# Altium PCB 主板-20190829.PcbDoc (part 2 of 6)
Units mm, origin at the board's own origin, x right, y up, seen from the top; angles counter-clockwise.
Board outline 97.69 x 103.45 mm, 2 copper layers (Top Layer, Bottom Layer); 77 components, 70 nets, 247 pads, 251 vias.
Unrouted connection lines stored in the file: 4.
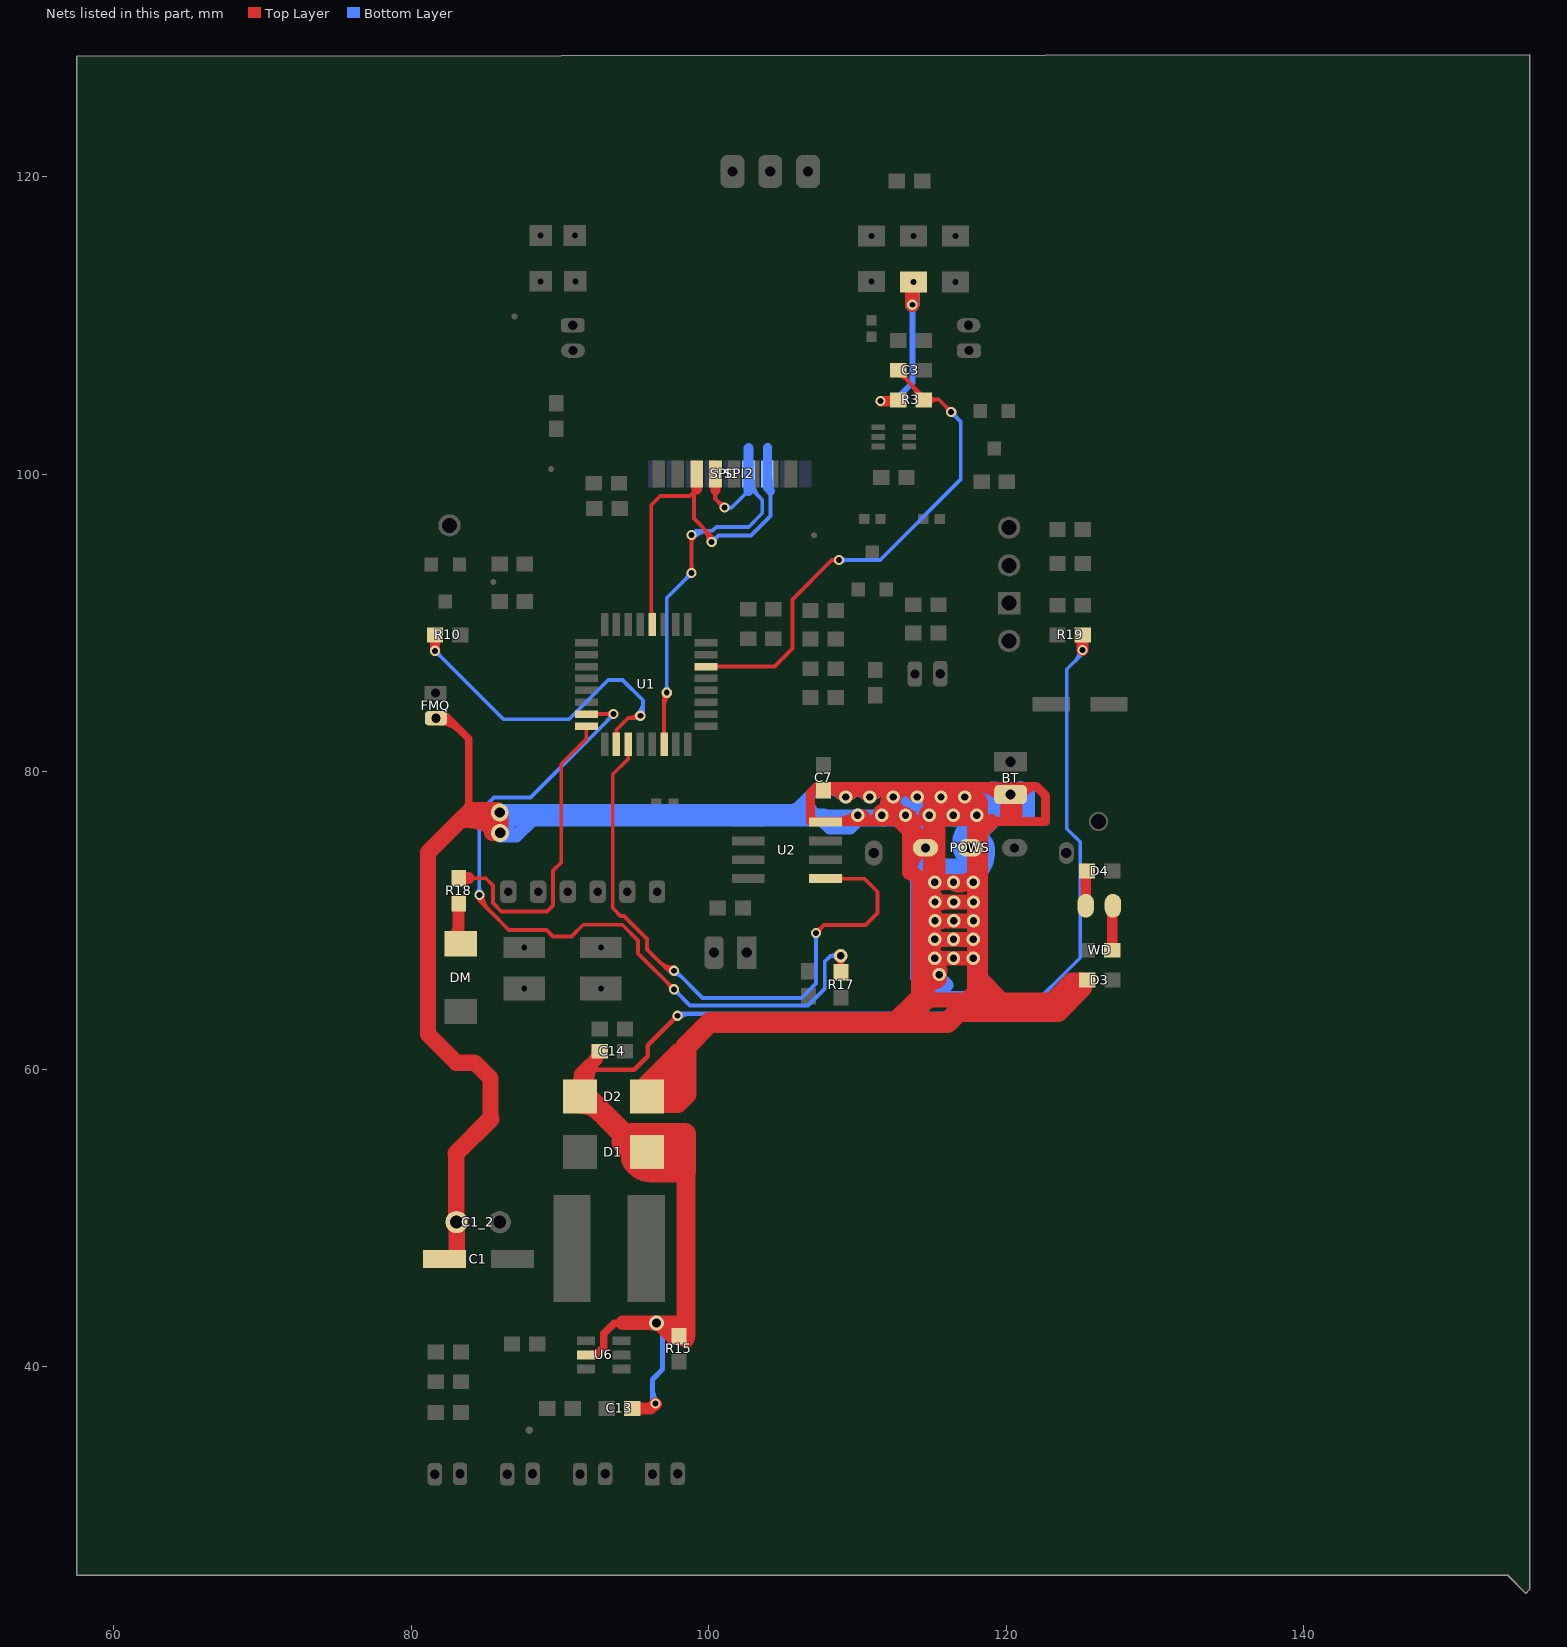
[diagram p2: the nets of this part, all layers, seen from the top]

## Via types
v1: diameter 0.9, hole 0.5, Top Layer to Bottom Layer, 107 vias
v2: diameter 0.68, hole 0.4, Top Layer to Bottom Layer, 87 vias
v3: diameter 1.1, hole 0.6, Top Layer to Bottom Layer, tented both sides, 17 vias
v4: diameter 0.6, hole 0.4, Top Layer to Bottom Layer, 7 vias
v5: diameter 0.8, hole 0.5, Top Layer to Bottom Layer, 5 vias
v6: diameter 0.7, hole 0.4, Top Layer to Bottom Layer, 5 vias
v7: diameter 1, hole 0.6, Top Layer to Bottom Layer, 4 vias
v8: diameter 1, hole 0.8, Top Layer to Bottom Layer, tented both sides, 4 vias
v9: diameter 1, hole 0.65, Top Layer to Bottom Layer, tented both sides, 4 vias
v10: diameter 1.2, hole 0.7, Top Layer to Bottom Layer, tented both sides, 2 vias
v11: diameter 1.1, hole 0.68, Top Layer to Bottom Layer, 2 vias
v12: diameter 0.8, hole 0.4, Top Layer to Bottom Layer, 2 vias
v13: diameter 0.9, hole 0.6, Top Layer to Bottom Layer, tented bottom, 1 vias
v14: diameter 0.95, hole 0.5, Top Layer to Bottom Layer, 1 vias
v15: diameter 0.9, hole 0.6, Top Layer to Bottom Layer, tented both sides, 1 vias
v16: diameter 1, hole 0.5, Top Layer to Bottom Layer, 1 vias
v17: diameter 1.1, hole 0.5, Top Layer to Bottom Layer, tented both sides, 1 vias

## Nets (pads, with @x,y where several pads share a name; then routed paths per layer and width w, separated by ;. In a path a pad name is that pad's centre, name@x,y a point inside that pad or via, vN(x,y) a via of type N, cw(c..) or ccw(c..) an arc to the next point about the centre after c; other vN are vias at no path point) (continued)
BT: BT.1 C1.2 C1_2.2 C7.2 D2.2 D3.1 FMQ.2 POWS.2 POWS.3 U2.4 | length 622.1
  Top Layer w0.5: FMQ.2@81.9,83.56 82.531,83.56 ; FMQ.2@81.931,83.375 cw(c81.931,81.482) 83.27,82.821 ; FMQ.2@81.931,83.875 cw(c81.931,83.19) 82.416,83.674 ; FMQ.2@82.106,83.755 ccw(c82.531,84.12) 82.531,83.56 ; 84.328,77.419 83.871,77.876 83.871,82.22 82.531,83.56
  Top Layer w0.6: 106.858,77.101 ccw(c107.528,77.101) U2.4@107.054,76.627 ; C7.2@107.864,78.662 cw(c108.727,77.8) 108.727,79.019 ; U2.4@108.628,76.657 ccw(c108.628,78.494) v1@109.927,77.195 ; 108.635,79.019 cw(c108.635,77.782) 109.556,78.609 ; 108.742,79.019 cw(c108.742,76.229) v1@110.715,78.202 ; v1@108.903,78.626 cw(c109.852,77.678) 109.852,79.019 ; v1@109.109,78.208 ccw(c107.29,76.573) C7.2@107.29,79.019 ; v1@109.327,78.202 cw(c111.3,76.229) 111.3,79.019 ; 110.133,76.632 ccw(c110.011,77.087) 110.481,77.13 ; v1@110.139,77.195 ccw(c111.437,78.494) 111.437,76.657 ; 110.19,79.019 cw(c110.19,77.678) v1@111.139,78.626 ; 110.228,76.657 ccw(c110.228,78.494) v1@111.527,77.195 ; 110.342,79.019 cw(c110.342,76.229) v1@112.315,78.202 ; v1@110.503,78.626 cw(c111.452,77.678) 111.452,79.019 ; v1@110.927,78.202 cw(c112.9,76.229) 112.9,79.019 ; 111.733,76.632 ccw(c111.611,77.087) 112.081,77.13 ; v1@111.74,77.193 ccw(c113.005,78.416) 113.005,76.657 ; 111.79,79.019 cw(c111.79,77.678) v1@112.739,78.626 ; 111.828,76.657 ccw(c111.828,78.494) v1@113.127,77.195 ; 111.942,79.019 cw(c111.942,76.229) v1@113.915,78.202 ; v1@112.103,78.626 cw(c113.052,77.678) 113.052,79.019 ; v1@112.527,78.202 cw(c114.5,76.229) 114.5,79.019 ; 113.333,76.632 ccw(c113.211,77.087) 113.681,77.13 ; v1@113.339,77.195 ccw(c114.637,78.494) 114.637,76.657 ; 113.39,79.019 cw(c113.39,77.678) v1@114.339,78.626 ; 113.428,76.657 ccw(c113.428,78.494) v1@114.727,77.195 ; 113.542,79.019 cw(c113.542,76.229) v1@115.515,78.202 ; v1@113.703,78.626 cw(c114.652,77.678) 114.652,79.019 ; v1@114.127,78.202 cw(c116.1,76.229) 116.1,79.019 ; 114.911,76.589 ccw(c114.781,77.076) 115.269,77.199 ; v1@114.939,77.195 ccw(c116.237,78.494) 116.237,76.657 ; 114.99,79.019 cw(c114.99,77.678) v1@115.939,78.626 ; 115.142,79.019 cw(c115.142,76.229) v1@117.115,78.202 ; v1@115.303,78.626 cw(c116.252,77.678) 116.252,79.019 ; v1@115.727,78.202 cw(c117.7,76.229) 117.7,79.019 ; v1@116.319,77.187 cw(c115.164,78.182) 115.164,76.657 ; 116.533,76.632 ccw(c116.411,77.087) 116.881,77.13 ; v1@116.539,77.195 ccw(c117.837,78.494) 117.837,76.657 ; 116.59,79.019 cw(c116.59,77.678) v1@117.539,78.626 ; 116.628,76.657 ccw(c116.628,78.494) v1@117.927,77.195 ; v1@116.903,78.626 cw(c117.852,77.678) 117.852,79.019 ; v1@117.327,78.202 cw(c119.3,76.229) BT.1@119.3,79.019 ; 117.683,79.019 cw(c117.683,76.305) BT.1@119.602,78.225 ; v1@118.164,77.162 ccw(c119.024,77.643) 119.024,76.657 ; 119.132,79.019 cw(c119.132,77.754) BT.1@120.027,78.649 ; BT.1@119.384,78.958 cw(c119.471,78.927) BT.1@119.471,79.019 ; BT.1@119.949,78.757 cw(c120.321,78.624) BT.1@120.321,79.019 ; BT.1@120.514,78.556 cw(c121.171,78.322) BT.1@121.171,79.019 ; BT.1@121.08,78.355 cw(c122.022,78.02) 122.022,79.019 ; C7.2@107.29,79.019 106.858,78.588 106.858,76.657 113.005,76.657 ; C7.2@107.29,79.019 122.022,79.019 ; 113.005,76.657 115.164,76.657 ; 115.164,76.657 119.024,76.657 ; 119.024,76.657 122.657,76.657 122.657,78.384 122.022,79.019
  Top Layer w1: C1_2.2@83.05,49.727 83.05,50.656 ; 113.487,73.231 cw(c115.328,73.231) POWS.3@114.376,74.806 ; 113.887,73.057 ccw(c115.189,74.359) v1@115.189,72.518 ; 114.097,64.668 117.577,64.668 119.024,64.668 ; POWS.3@114.354,74.987 cw(c114.734,76.175) 113.487,76.175 113.487,73.457 114.351,72.593 ccw(c114.823,73.065) v1@115.219,72.528 ; v1@114.859,72.517 115.672,72.517 ; v1@114.884,69.926 115.697,69.926 ; v1@114.884,71.196 115.697,71.196 ; v1@115.164,72.644 v1@117.373,72.644 ; 115.672,67.462 v1(116.459,67.462) v1(117.78,67.462) v1@117.881,67.462 ; 115.672,68.732 v1(116.459,68.732) v1(117.78,68.732) v1@117.881,68.732 ; 115.672,72.568 v1(116.459,72.568) v1(117.78,72.568) v1@117.881,72.568 ; 115.697,69.977 v1(116.484,69.977) v1(117.805,69.977) v1@117.907,69.977 ; 115.697,71.247 v1(116.484,71.247) v1(117.805,71.247) v1@117.907,71.247 ; v1@116.429,72.528 ccw(c116.864,73.103) 117.373,72.593 v1@117.615,72.834 ; v1@116.446,72.519 ccw(c116.757,73.692) v1@117.615,72.834 ; 117.227,72.611 cw(c117.516,72.111) v1@117.805,72.611 ; 117.301,72.551 cw(c117.625,71.99) v1@117.793,72.616 ; v1@117.73,72.568 cw(c118.652,72.568) 118,73.22 ; POWS.2@117.753,74.821 cw(c116.524,73.592) 118.262,73.592 ; POWS.2@117.769,74.975 ccw(c117.158,75.895) 118.262,75.895 ; v1@117.794,72.52 ccw(c117.602,73.152) 118.262,73.152 ; v1@117.811,68.772 cw(c117.346,68.183) 118.022,67.86 ; v1@117.812,72.53 ccw(c117.013,73.457) 118.237,73.457 ; v1@117.815,67.427 ccw(c116.797,68.445) 118.237,68.445 ; v1@117.815,67.498 cw(c116.797,66.479) 118.237,66.479 118.237,73.127 ; v1@117.815,68.697 ccw(c116.797,69.715) 118.237,69.715 ; v1@117.815,68.768 cw(c116.797,67.749) 118.237,67.749 ; v1@117.815,72.532 ccw(c116.735,73.612) 118.262,73.612 ; v1@117.815,72.603 cw(c116.797,71.585) 118.237,71.585 ; v1@117.841,69.942 ccw(c116.883,70.899) 118.237,70.899 ; v1@117.841,70.012 cw(c116.883,69.055) 118.237,69.055 ; v1@117.841,71.212 ccw(c116.883,72.169) 118.237,72.169 ; v1@117.841,71.282 cw(c116.883,70.325) 118.237,70.325 ; POWS.2@117.923,74.904 cw(c119.104,75.054) 118.262,75.895 ; POWS.2@117.924,74.892 cw(c119.529,74.892) 118.394,76.027 ; 119.024,76.657 118.262,75.895 ; D3.1@125.15,66 124.395,66 123.063,64.668 119.736,64.668 ; v1@117.615,72.834 117.945,72.834 118.237,73.127 ; v1@117.615,72.834 118.237,73.457 ; 118.237,73.127 cw(c117.6,73.127) 117.795,72.52 ccw(c117.6,73.127) 118.237,73.127 ; 118.237,73.127 118.262,73.152 ; 118.237,73.127 118.237,73.457 ; 118.262,73.152 118.262,75.895 ; 119.024,64.668 119.736,64.668 ; 119.024,64.668 118.237,65.456 118.237,66.167 119.736,64.668 ; v1@113.268,77.124 cw(c112.739,76.595) 113.487,76.595 ccw(c112.739,76.595) v1@113.268,77.124
  Top Layer w1.1: C1_2.2@83.033,49.727 83.033,54.356 ; 83.05,47.898 C1_2.2@83.05,49.727 ; 83.773,76.759 cw(c83.773,73.69) v10@85.944,75.86 ; 84.606,76.759 ccw(c84.606,78.614) v10@85.918,77.302 ; 85.327,56.65 85.327,59.403 84.277,60.452 83.033,60.452 81.128,62.357 81.128,74.574 83.312,76.759 ; v10@85.446,75.92 cw(c87.301,75.92) v10@85.989,77.231 ; 85.446,76.548 cw(c86.137,76.548) v10@85.966,77.218 ; v10(85.954,77.267) 85.801,77.419 84.328,77.419 83.972,77.419 83.312,76.759 ; v10@85.998,75.942 cw(c86.326,76.759) 85.446,76.759 ; v10@86.004,77.216 86.004,75.895 85.446,75.895 85.446,76.759 ; 83.312,76.759 85.446,76.759
  Top Layer w1.2: 83.033,54.356 85.327,56.65 ; v1@111.633,77.239 cw(c111.633,75.331) 112.982,76.68 ; 112.166,77.292 112.37,77.292 ; v1@112.271,78.308 ccw(c114.486,78.308) 112.92,76.742 ; v1@112.303,78.401 ccw(c112.961,77.884) 112.37,77.292 ; 112.492,77.482 ccw(c113.493,78.06) v1@113.194,76.944 ; v1@113.083,77.089 ccw(c114.313,77.089) 113.443,76.219 ; v1@113.234,76.939 cw(c113.222,78.145) 112.37,77.292 ; 114.009,75.653 cw(c113.247,74.892) POWS.3@114.324,74.892 ; 114.174,75.488 113.005,76.657 112.37,77.292 ; v1@114.727,77.195 cw(c116.003,75.918) 116.003,77.724 ; 115.262,77.724 cw(c115.262,75.918) v1@116.539,77.195 ; v1@115.515,78.202 ccw(c116.669,79.356) 116.669,77.724 ; v1@115.771,78.3 cw(c115.164,78.332) 115.164,77.724 117.932,77.724 cw(c117.932,78.674) v1@117.088,78.24 ; 116.173,77.724 ccw(c116.173,79.356) v1@117.327,78.202 ; v1@116.327,77.195 cw(c117.603,75.918) 117.603,77.724 ; 116.862,77.724 cw(c116.862,75.918) v1@118.139,77.195
  Top Layer w1.4: D2.2@95.91,57.836 D2.2@95.91,58.166 ; D2.2@96.105,58.537 ccw(c96.763,59.497) 97.587,58.674 ; D2.2@96.168,58.484 ccw(c97.917,60.232) 97.917,57.76 ; D2.2@96.3,58.166 cw(c99.203,58.166) 97.15,60.219 ; 97.587,60.655 97.587,58.674 ; 97.993,61.062 95.91,58.979 D2.2@95.91,58.166 ; 114.097,64.668 112.573,63.144 ; v1@117.322,78.537 cw(c116.802,77.364) v1@118.085,77.364 ; v1@117.398,78.485 cw(c115.74,76.827) v1@118.085,76.827 ; 118.085,77.927 118.085,65.176 117.577,64.668 116.802,63.894 ; 125.07,65.481 123.482,63.894 116.802,63.894 ; D2.2@95.91,58.166 96.317,57.76 97.917,57.76 ; D2.2@95.91,58.166 D2.2@95.85,58.166 97.079,58.166 97.587,58.674 ; 97.917,57.76 98.476,58.318 98.476,61.544 100.076,63.144 112.573,63.144 ; 112.573,63.144 116.053,63.144 116.802,63.894
  Top Layer w1.5: 114.351,64.526 cw(c117.09,64.526) v1@115.297,66.597 ; 114.351,64.922 114.351,72.593 ccw(c116.54,72.593) v1@115.004,71.033 ; 114.351,66.163 cw(c116.488,66.163) v1@114.977,67.675 ; 114.351,67.433 cw(c116.488,67.433) v1@114.977,68.945 ; 114.351,68.405 ccw(c117.529,68.405) v1@115.282,66.158 ; 114.351,68.616 cw(c116.575,68.616) v1@115.002,70.189 ; 114.351,68.762 ccw(c116.488,68.762) v1@114.977,67.25 ; 114.351,69.886 cw(c116.575,69.886) v1@115.002,71.459 ; 114.351,70.032 ccw(c116.488,70.032) v1@114.977,68.52 ; 114.351,71.268 cw(c116.488,71.268) v1@114.977,72.78 ; 114.351,71.338 ccw(c116.575,71.338) v1@115.002,69.765 ; v1@115.164,72.593 115.164,72.644 115.164,76.657 115.164,77.724 ; 120.345,77.216 120.345,77.572 ; 115.164,77.928 cw(c116.001,77.928) 115.409,78.52 ccw(c116.001,77.928) 115.164,77.928
  Bottom Layer w0.8: 105.693,77.27 105.896,77.473 107.34,78.918 117.132,78.918 ; 106.829,77.473 107.224,77.079 107.544,76.759 108.128,76.175 109.525,76.175 v1@110.058,76.708 ; 107.629,78.918 cw(c107.629,76.716) v1@109.186,78.273 ; 108.992,76.708 ccw(c108.992,78.13) v1@109.997,77.124 ; 109.229,78.918 cw(c109.229,76.716) v1@110.786,78.273 ; v1@109.256,78.273 cw(c110.813,76.716) 110.813,78.918 ; 109.66,76.31 ccw(c108.88,77.089) v1@109.983,77.089 ; v1@110.068,77.124 ccw(c111.073,78.13) 111.073,76.708 ; v1@110.338,76.987 v1@110.058,76.708 ; 110.592,76.708 ccw(c110.592,78.13) v1@111.597,77.124 ; 110.829,78.918 cw(c110.829,76.716) v1@112.386,78.273 ; v1@110.856,78.273 cw(c112.413,76.716) 112.413,78.918 ; v1@111.668,77.124 ccw(c112.673,78.13) 112.673,76.708 ; 112.192,76.708 ccw(c112.192,78.13) v1@113.197,77.124 ; 112.429,78.918 cw(c112.429,76.716) v1@113.986,78.273 ; v1@112.456,78.273 cw(c114.013,76.716) 114.013,78.918 ; v1@113.275,77.115 ccw(c113.995,77.548) 113.995,76.708 ; 114.029,78.918 cw(c114.029,76.716) v1@115.586,78.273 ; v1@114.056,78.273 cw(c115.613,76.716) 115.613,78.918 ; v1@114.792,77.118 cw(c113.995,77.687) 113.995,76.708 ; v1@114.868,77.124 ccw(c115.873,78.13) 115.873,76.708 ; 115.392,76.708 ccw(c115.392,78.13) v1@116.397,77.124 ; 115.629,78.918 cw(c115.629,76.716) v1@117.186,78.273 ; v1@115.658,78.274 cw(c117.132,76.907) 117.132,78.918 ; v1@116.468,77.124 ccw(c117.473,78.13) 117.473,76.708 ; 116.992,76.708 ccw(c116.992,78.13) v1@117.997,77.124 ; v1@117.18,78.337 ccw(c116.814,78.599) 117.132,78.918 ; v1@117.221,78.258 cw(c117.221,76.88) 118.195,77.855 ; v1@117.256,78.273 cw(c118.813,76.716) 118.813,78.918 ; 117.291,78.759 cw(c115.621,77.089) v1@117.983,77.089 ; v1@118.021,77.138 ccw(c117.904,77.635) 118.415,77.635 ; v1@118.068,77.124 ccw(c118.96,78.017) 118.96,76.755 ; 118.17,78.918 cw(c118.17,76.792) BT.1@119.673,78.295 ; 118.389,76.683 118.389,76.708 ; BT.1@120.653,78.242 cw(c120.078,76.884) 121.552,76.884 ; BT.1@120.964,78.978 cw(c120.589,78.092) 121.552,78.092 ; BT.1@120.997,78.437 cw(c121.552,78.358) 121.552,78.918 ; 121.219,77.079 120.828,77.079 119.771,77.079 118.785,77.079 v1@118.415,77.079 ; v1@110.058,76.708 108.102,76.708 108.052,76.759 107.732,77.079 113.995,77.079 118.389,77.079 v1@118.415,77.079 ; v1@110.058,76.708 113.995,76.708 ; 113.995,76.708 118.389,76.708 ; 117.132,78.918 121.552,78.918 ; 117.132,78.918 118.415,77.635 ; 118.389,76.708 118.415,76.733 ; 118.389,76.708 118.415,76.708 118.415,76.733 ; 118.415,76.733 118.436,76.755 118.462,76.755 120.735,76.755 120.752,76.771 121.221,76.771 121.552,77.102 121.552,78.918 ; 118.415,76.733 v1@118.415,77.079 ; v1@118.415,77.079 118.415,77.635
  Bottom Layer w0.9: v10@85.852,75.975 ccw(c85.228,76.37) v10@85.75,76.893 ; v10(85.954,77.267) v10@86.131,77.089 ; v10@86.004,75.895 86.639,75.895 86.69,75.946 ; v10@86.06,77.161 cw(c86.64,76.581) 86.64,77.401 ; v10@86.06,77.373 ccw(c87.542,78.855) 87.542,76.759 ; 86.832,75.692 cw(c86.832,76.748) v10@86.085,76.001 ; 106.829,77.473 105.896,77.473 105.824,77.401 85.942,77.401 85.827,77.285 v10@85.827,77.267 ; 107.224,77.079 107.732,77.079 ; 108.636,76.759 108.052,76.759 107.544,76.759 88.135,76.759 ; v10@85.75,76.893 85.972,76.671 85.972,75.692 87.068,75.692 88.135,76.759 ; v10@85.75,76.893 85.75,77.209 85.808,77.267 v10@85.827,77.267 ; v10@85.827,77.267 v10@86.131,76.962 ; v10@86.085,76.001 cw(c86.893,76.809) 85.75,76.809 ccw(c86.893,76.809) v10@86.085,76.001 ; v10@86.131,76.962 86.335,76.759 86.462,76.759 ; v10@86.131,76.962 v10@86.131,77.089 ; v10@86.131,77.089 86.462,76.759 ; 86.462,76.759 88.135,76.759
  Bottom Layer w1: 114.267,73 cw(c114.267,71.646) v1@115.224,72.603 ; 114.376,73.685 117.678,73.685 ; 114.935,66.97 cw(c115.682,66.97) v1@115.154,67.498 ; v1@114.935,67.599 ccw(c116.722,67.599) v1@115.458,66.335 ; 114.935,67.955 ccw(c115.682,67.955) v1@115.154,67.427 ; 114.935,68.24 cw(c115.682,68.24) v1@115.154,68.768 ; 114.935,69.225 ccw(c115.682,69.225) v1@115.154,68.697 ; 114.935,69.423 cw(c115.768,69.423) v1@115.179,70.012 ; 114.935,70.531 ccw(c115.768,70.531) v1@115.179,69.942 ; 114.935,70.693 cw(c115.768,70.693) v1@115.179,71.282 ; 114.935,71.801 ccw(c115.768,71.801) v1@115.179,71.212 ; 114.935,72.075 cw(c115.682,72.075) 115.154,72.603 cw(c116.111,71.646) 116.111,73 ; v1@114.935,72.314 114.935,66.675 115.951,65.659 ; v1@115.139,67.462 ccw(c117.532,67.462) 115.84,65.77 ; 115.537,73 cw(c115.537,71.646) v1@116.494,72.603 ; v1@116.423,72.602 cw(c117.348,71.724) 117.348,73 114.046,73 114.046,66.192 115.468,64.77 118.212,64.77 118.212,76.505 118.389,76.683 ; 116.858,73 cw(c116.858,71.646) 117.815,72.603 cw(c116.858,71.646) 118.212,71.646 ; POWS.2@117.753,74.821 cw(c116.647,73.715) 118.212,73.715 ; POWS.2@117.753,74.963 ccw(c116.647,76.069) 118.212,76.069 ; v1@117.815,67.427 ccw(c116.858,68.384) 118.212,68.384 ; v1@117.815,67.498 cw(c116.858,66.541) 118.212,66.541 ; v1@117.815,68.697 ccw(c116.858,69.654) 118.212,69.654 ; v1@117.815,68.768 cw(c116.858,67.811) 118.212,67.811 ; v1@117.815,72.532 ccw(c116.858,73.49) 118.212,73.49 ; v1@117.841,69.942 ccw(c116.945,70.837) 118.212,70.837 ; v1@117.841,70.012 cw(c116.945,69.117) 118.212,69.117 ; v1@117.841,71.212 ccw(c116.945,72.107) 118.212,72.107 ; v1@117.841,71.282 cw(c116.945,70.387) 118.212,70.387 ; 118.389,76.708 118.389,77.079 v1@118.389,77.14
  Bottom Layer w1.3: 118.608,78.537 118.461,78.389 ; 119.771,77.079 119.278,77.572 118.461,78.389 ; BT.1@119.85,78.472 ccw(c119.202,77.648) 118.461,78.389 ; 120.828,77.079 120.828,77.47
  Bottom Layer w2: 113.995,77.114 113.995,77.079 113.995,76.708 113.995,73.609 114.605,73 cw(c115.925,74.32) POWS.3@114.206,75.048 ; POWS.2@117.424,74.892 cw(c119.417,74.892) 118.008,76.301 ; POWS.2@117.448,74.755 cw(c118.583,75.168) 117.729,76.022 ; POWS.2@117.681,75.072 cw(c116.081,74.266) 117.348,73 117.729,73.381 ; 118.212,76.505 117.729,76.022 ; POWS.2@118.217,74.967 cw(c116.475,74.634) 117.729,73.381 ; 118.389,76.683 118.415,76.708 118.462,76.755 118.785,77.079 119.278,77.572 BT.1@119.99,78.283 ; 118.432,76.725 ccw(c118.068,77.089) 118.583,77.089 ; 113.622,77.478 cw(c112.719,76.576) 113.995,76.576 ; 113.622,77.478 cw(c112.719,76.576) 113.995,76.576 ; 113.622,77.478 cw(c112.719,76.576) 113.995,76.576 ; 113.622,77.478 cw(c112.719,76.576) 113.995,76.576 ; 113.622,77.478 cw(c112.719,76.576) 113.995,76.576 ; 113.995,76.395 cw(c115.526,76.395) 114.444,77.478 ; 113.995,76.395 cw(c115.526,76.395) 114.444,77.478 ; 113.995,76.395 cw(c115.526,76.395) 114.444,77.478 ; 113.995,76.395 cw(c115.526,76.395) 114.444,77.478 ; 113.995,76.395 cw(c115.526,76.395) 114.444,77.478 ; 117.729,73.381 117.729,76.022 ; 118.033,76.539 ccw(c118.033,77.054) 118.397,76.69 ; 118.033,76.539 ccw(c118.033,77.054) 118.397,76.69 ; 118.033,76.539 ccw(c118.033,77.054) 118.397,76.69
  other v1: 115.494,66.37 115.189,67.462 115.189,68.732 115.214,69.977 115.214,71.247 115.189,72.568 110.033,77.089 111.633,77.089 113.233,77.089 114.833,77.089 116.433,77.089 118.033,77.089 109.221,78.308 110.821,78.308 112.421,78.308 114.021,78.308 115.621,78.308 117.221,78.308
  other v10: 85.979,75.895
BTJC: 
C-84: C13.1 C14.1 D1.2 D2.1 R15.1 R19.1 U6.5 | length 174.5
  Top Layer w0.3: D2.1@91.119,59.139 ccw(c90.924,59.963) 91.77,59.963 ; D2.1@91.188,58.847 ccw(c91.014,59.583) 91.77,59.583 ; D2.1@91.35,58.887 91.599,59.136 91.77,58.965 91.77,59.963 ; 91.77,59.566 ccw(c92.75,59.566) D2.1@92.057,58.873 ; v2@97.702,63.602 cw(c97.243,63.602) 97.567,63.277 cw(c97.892,62.953) v2@97.892,63.412 ; v2(97.892,63.602) 95.91,61.62 95.91,60.884 94.989,59.963 91.77,59.963
  Top Layer w0.5: D2.1@91.35,58.166 D2.1@91.77,58.166 ; U6.5@91.75,40.8 92.413,40.8 92.939,41.326 92.939,42.215 93.65,42.926 v7@96.52,42.926 ; U6.5@92.055,40.845 ccw(c92.055,41.818) 92.743,41.13 ; D1.2@95.506,54.43 D1.2@95.85,54.43 ; 95.83,42.926 ccw(c95.83,43.616) v7@96.318,43.128 ; 95.952,42.926 cw(c95.952,42.409) v7@96.318,42.775
  Top Layer w0.8: D2.1@90.893,58.761 ccw(c90.181,59.688) 91.35,59.688 ; D2.1@91.303,58.15 cw(c93.103,58.755) 91.76,60.098 ; D2.1@91.35,58.166 91.35,58.887 91.35,59.688 ; D2.1@91.807,58.761 cw(c92.519,59.688) 91.35,59.688 ; D2.1@92.061,58.405 cw(c94.469,59.214) 92.673,61.011 91.35,59.688 ; 92.275,60.613 ccw(c91.677,61.211) C14.1@92.523,61.211 ; 92.453,60.63 ccw(c91.82,60.996) C14.1@92.526,61.185 ; C13.1@94.85,37.2 96.092,37.2 v2(96.418,37.526) ; 95.776,37.2 ccw(c95.776,38.168) v2@96.461,37.484 ; v7(96.495,42.951) 96.52,42.926 97.561,41.885 97.835,41.885 R15.1@98,42.05 ; v7@96.713,42.733 ccw(c98,44.021) R15.1@98,42.2 ; 97.358,42.692 R15.1@98,42.05 ; R15.1@97.929,42.171 ccw(c96.058,44.042) 98.704,44.042 ; R15.1@98.062,42.178 ccw(c98.363,42.556) 98.704,42.215 ; 98.4,54.686 98.704,54.381 98.704,42.215 ; R15.1@98.495,41.605 ccw(c97.99,42.111) 98.704,42.111 ; v2(125.146,88.189) R19.1@125.146,89 ; R15.1@98,42.05 98.31,42.05 98.425,41.935 98.704,42.215
  Top Layer w1: 94.234,42.961 98.45,42.961 ; D1.2@95.762,54.769 cw(c96.129,53.353) 97.163,54.387 ; 95.922,42.961 cw(c95.922,40.022) R15.1@98,42.1 ; D1.2@96.013,53.801 cw(c96.638,51.389) 98.4,53.151 ; 97.13,54.421 98.4,53.151 ; 98.45,53.1 98.4,53.151
  Top Layer w1.2: 98.45,42.961 98.45,53.1 ; R15.1@98.071,42.029 ccw(c97.154,42.946) 98.45,42.946 cw(c97.154,42.946) R15.1@98.071,42.029
  Top Layer w1.5: D2.1@91.35,57.766 cw(c91.35,55.786) 92.75,57.186 ; D2.1@91.77,58.166 94.285,55.651 ; D1.2@94.839,53.996 ccw(c96.123,54.547) 96.123,53.151 ; D1.2@94.854,54.897 cw(c96.041,54.341) 96.041,55.651 ; D1.2@95.506,54.43 94.285,55.651 ; D1.2@95.705,54.803 cw(c95.198,56.108) 94.209,55.118 96.176,53.151 98.4,53.151 ; D1.2@96.212,54.261 cw(c98.399,53.236) 98.399,55.651 ; D1.2@96.218,54.588 ccw(c98.399,55.525) 98.399,53.151 ; 97.13,54.421 97.13,55.016 ; 94.285,55.651 98.4,55.651 ; 94.58,55.356 ccw(c95.85,56.626) D1.2@95.85,54.83 ; 94.58,55.356 ccw(c95.85,56.626) D1.2@95.85,54.83 ; 94.58,55.356 ccw(c95.85,56.626) D1.2@95.85,54.83 ; 98.4,53.151 98.4,54.686 98.4,55.651
  Bottom Layer w0.254: 121.202,63.721 124.978,67.498 124.978,75.272 124.079,76.171 124.079,86.893 v2@125.146,87.96 ; 124.621,87.435 ccw(c123.867,88.189) v2@124.933,88.189
  Bottom Layer w0.3: v2(97.892,63.602) 98.011,63.721 121.202,63.721 ; v2@98.026,63.467 cw(c98.64,62.854) 98.64,63.721
  Bottom Layer w0.35: 96.225,38.391 ccw(c97.283,38.391) v2@96.535,37.643 ; v2(96.418,37.526) 96.225,37.719 96.225,39.151 96.901,39.827 96.901,42.545 v7(96.495,42.951)
CE: SPI1.6 SPI2.6 U1.12 | length 29.8
  Top Layer w0.254: U1.12@96.139,89.902 96.139,97.942 96.749,98.552 98.73,98.552 99.009,98.831 99.009,97.028 100.203,95.834 ; 96.139,90.872 ccw(c96.644,90.872) U1.12@96.287,90.514 ; 99.57,96.467 cw(c98.556,95.453) v2@99.99,95.453 ; 100.004,96.034 cw(c99.423,95.453) v2@100.244,95.453 ; v2@100.091,95.635 ccw(c99.969,95.834) 100.203,95.834 ; v2@100.203,95.326 100.203,95.834 ; v2@100.315,95.635 cw(c100.437,95.834) 100.203,95.834
  Top Layer w0.7: 99.187,99.009 SPI1.6@99.187,100.032
  Bottom Layer w0.254: v2(100.203,95.453) 100.221,95.453 100.653,95.885 102.845,95.885 104.165,97.206 104.165,98.882 ; v2@100.203,95.666 ccw(c100.203,96.224) 100.597,95.83 ; v2@100.416,95.453 cw(c100.887,95.453) 100.554,95.786
  Bottom Layer w0.6: 103.95,101.803 103.95,99.098 104.165,98.882 cw(c104.547,99.264) SPI2.6@104.062,99.502
CMD2: 
CSN: SPI1.5 SPI2.5 U1.30 | length 40.1
  Top Layer w0.254: U1.30@96.913,82.464 ccw(c96.703,82.674) 97,82.674 ccw(c97.297,82.674) U1.30@97.087,82.464 ; U1.30@97,81.853 97,85.138 v2(97.18,85.319) ; 97,84.369 cw(c98.13,84.369) v2@97.331,85.168 ; 97,84.982 cw(c97.517,84.982) v2@97.151,85.348 ; v2@98.706,93.521 ccw(c98.359,93.868) 98.85,93.868 ; v2@98.706,95.76 cw(c98.359,95.413) 98.85,95.413 ; v2@98.85,93.55 98.85,95.904 v2(98.857,95.91) ; 98.85,93.901 ccw(c99.387,93.901) v2@99.007,93.521 ; 98.85,95.38 cw(c99.387,95.38) v2@99.007,95.76
  Top Layer w0.3: 100.457,98.933 100.457,98.349 v2@101.054,97.752 ; 100.699,98.107 ccw(c101.067,98.475) v2@101.067,97.955 ; 100.76,98.046 cw(c100.479,97.765) v2@100.877,97.765
  Top Layer w0.7: 100.457,98.933 SPI1.5@100.457,100.032
  Bottom Layer w0.254: v2@97.03,85.469 ccw(c96.666,85.833) 97.18,85.833 ccw(c97.695,85.833) v2@97.331,85.469 ; v2(97.18,85.319) 97.18,91.694 v2(98.857,93.37) ; v2@98.644,93.37 cw(c98.13,93.37) 98.493,93.007 cw(c98.857,92.643) v2@98.857,93.157 ; v2@98.828,95.939 cw(c99.494,95.274) 99.494,96.215 ; v2(98.857,95.91) 99.162,96.215 100.265,96.215 100.519,96.469 102.692,96.469 103.607,97.384 103.607,98.274 SPI2.5@102.68,99.2 ; v2@99.007,95.76 cw(c100.107,94.66) 100.107,96.215 ; v2(101.067,97.765) 101.549,97.765 ; v2@101.224,97.621 cw(c101.549,97.324) 101.549,97.765 ; v2@101.224,97.908 ccw(c101.549,98.205) 101.549,97.765 ; 102.68,98.895 101.549,97.765 ; SPI2.5@102.724,99.557 ccw(c103.691,99.557) 103.007,98.873 ; SPI2.5@102.978,99.557 ccw(c104.558,99.557) 103.441,98.439
  Bottom Layer w0.7: 102.68,98.895 102.68,101.752
DM: R18.2 U1.24 | length 23.7
  Top Layer w0.254: R18.2@83.2,72.65 83.4,72.85 85.011,72.85 85.496,72.365 85.496,71.171 86.055,70.612 89.129,70.612 89.535,71.018 89.535,73.355 90.094,73.914 90.094,80.543 91.775,82.225 U1.24@91.775,83.078 ; R18.2@83.464,72.586 cw(c84.1,71.95) 84.1,72.85 cw(c84.1,73.751) R18.2@83.464,73.114 ; U1.24@91.688,82.991 cw(c91.478,82.781) 91.775,82.781 cw(c92.072,82.781) U1.24@91.862,82.991
  Top Layer w0.8: R18.2@83.2,72.85 83.85,72.85
DMD: DM.2 R18.1 | length 4.8
  Top Layer w0.254: R18.1@83.134,70.632 R18.1@83.2,70.95
  Top Layer w0.8: DM.2@82.772,68.75 ccw(c81.768,69.754) 83.188,69.754 ; DM.2@83.188,68.508 R18.1@83.188,71.275 ; 83.188,69.283 ccw(c83.941,69.283) DM.2@83.408,68.75
DMLED: R17.2 U1.23 | length 62.7
  Top Layer w0.254: v2@84.47,71.548 cw(c84.348,71.349) 84.582,71.349 ; v2@84.541,71.73 ccw(c85.362,71.73) 84.781,71.149 ; v2(84.582,71.73) 84.582,71.349 ; v2@84.694,71.548 ccw(c84.816,71.349) 84.582,71.349 ; v2@84.795,71.73 ccw(c86.229,71.73) 85.215,70.716 ; U1.23@91.775,83.878 91.794,83.896 v2@93.65,83.896 ; U1.23@92.387,83.791 cw(c92.642,83.535) 92.642,83.896 ; U1.23@92.387,83.964 ccw(c92.552,84.129) 92.552,83.896 ; v2@93.448,83.746 ccw(c93.085,83.382) 93.085,83.896 ccw(c93.085,84.41) v2@93.448,84.047 ; v2@97.45,65.38 ccw(c96.936,65.38) 97.299,65.743 ccw(c97.663,66.107) v2@97.663,65.593 ; v2(97.663,65.38) 95.25,67.793 95.25,68.656 94.183,69.723 91.567,69.723 90.78,68.936 89.535,68.936 89.103,69.367 86.563,69.367 86.121,69.81 86.121,69.813 85.699,70.236 85.695,70.236 84.582,71.349 ; v1@108.649,67.399 cw(c108.067,66.817) R17.2@108.89,66.817 ; R17.2@108.653,66.86 ccw(c108.187,67.386) v1@108.89,67.386 ; v1@108.747,67.332 cw(c108.688,67.198) 108.829,67.16 cw(c109.056,67.099) v1@108.981,67.322 ; v1@108.782,67.319 cw(c108.705,67.07) 108.956,67.138 cw(c109.14,67.187) v1@109.043,67.35 ; v1(108.877,67.627) 108.877,67.399 v1@108.89,67.386 ; R17.2@108.89,66.531 v1@108.89,67.386 ; R17.2@108.89,66.878 cw(c109.626,66.878) v1@109.105,67.399 ; R17.2@109.135,66.87 cw(c109.555,67.386) v1@108.89,67.386
  Bottom Layer w0.254: v2@84.431,71.88 ccw(c84.068,72.244) 84.582,72.244 ccw(c85.096,72.244) v2@84.733,71.88 ; v2(84.582,71.73) 84.582,77.283 85.575,78.275 88.029,78.275 v2@93.65,83.896 ; 93.199,83.446 ccw(c92.749,83.896) v2@93.386,83.896 ; 93.322,83.569 cw(c93.599,83.292) v2@93.599,83.683 ; v2@97.663,65.167 cw(c97.663,64.652) 98.027,65.016 cw(c98.39,65.38) v2@97.876,65.38 ; v2(97.663,65.38) 98.751,64.291 106.684,64.291 107.798,65.405 107.798,67.234 108.191,67.627 ; v1@108.628,67.422 ccw(c108.191,67.061) 108.191,67.627 ; v1@108.628,67.833 cw(c108.191,68.194) 108.191,67.627 ; v1(108.877,67.627) 108.191,67.627
  other v2: 93.599,83.896
DW: D4.1 pad.4@125.349,71 | length 2.5
  Top Layer w0.7: pad.4@125.349,71 D4.1@125.349,73.476
DW+: pad.4@127.178,71 WD.1 | length 3.5
  Top Layer w0.7: WD.1@127.139,68 pad.4@127.139,71 ; 127.139,70.173 cw(c127.755,70.173) pad.4@127.319,70.609
FI-R: U1.27 U2.1 | length 47.2
  Top Layer w0.254: U1.27@94.513,81.241 cw(c94.303,81.031) 94.6,81.031 cw(c94.897,81.031) U1.27@94.687,81.241 ; U1.27@94.6,81.853 94.6,80.884 93.548,79.832 93.548,70.841 94.082,70.307 94.317,70.307 95.86,68.765 95.86,68.047 97.282,66.624 ; 96.649,67.257 ccw(c97.663,68.271) v2@97.663,66.837 ; 97.083,66.824 ccw(c97.663,67.404) v2@97.663,66.583 ; v2@97.482,66.513 ccw(c97.282,66.39) 97.282,66.624 ; v2@97.482,66.736 cw(c97.282,66.858) 97.282,66.624 ; v2(97.663,66.624) 97.282,66.624 ; v2(107.213,69.164) 107.747,69.698 110.541,69.698 111.354,70.51 111.354,71.933 110.469,72.817 U2.1@108.154,72.817 ; v2@107.213,69.377 ccw(c107.213,69.891) 107.577,69.528 ccw(c107.941,69.164) v2@107.426,69.164 ; U2.1@108.776,72.695 cw(c109.072,72.399) 109.072,72.817 cw(c109.072,73.235) U2.1@108.776,72.939
  Bottom Layer w0.254: v2@97.663,66.411 cw(c97.663,65.652) 98.2,66.189 ; v2@97.765,66.624 99.589,64.799 106.252,64.799 107.213,65.761 v2(107.213,69.164) ; v2@97.876,66.624 ccw(c98.145,66.624) 97.955,66.434 ; v2@107.063,69.014 cw(c106.699,68.65) 107.213,68.65 cw(c107.728,68.65) v2@107.364,69.014
FL: pad.0@113.78,112.932 R3.2 | length 15.8
  Top Layer w0.254: pad.0@113.65,112.822 113.538,112.822 113.538,112.932 pad.0@113.75,112.932
  Top Layer w0.6: pad.0@113.65,112.822 pad.0@113.69,112.862
  Top Layer w0.7: 112.15,104.927 v2(111.557,104.927) 112.677,104.927 R3.2@112.75,105 ; 112.162,104.927 ccw(c112.162,105.538) R3.2@112.594,105.106 ; 112.162,104.927 ccw(c112.162,105.538) R3.2@112.594,105.106 ; 112.162,104.927 ccw(c112.162,105.538) R3.2@112.594,105.106
  Top Layer w1: v2(113.69,111.404) pad.0@113.69,112.862 ; pad.0@113.69,112.233 cw(c114.479,112.233) pad.0@113.921,112.79
  Bottom Layer w0.4: v2(111.557,104.927) 112.471,104.927 113.69,106.147 v2(113.69,111.404)
  Bottom Layer w1: v2(113.69,111.404) pad.0@113.69,112.862 ; pad.0@113.69,112.233 cw(c114.479,112.233) pad.0@113.921,112.79
FL-U: C3.2 R3.1 U1.6 | length 43.1
  Top Layer w0.254: U1.6@99.825,87.077 104.426,87.077 105.639,88.29 105.639,91.592 108.28,94.234 ; U1.6@100.437,86.991 cw(c100.647,86.781) 100.647,87.077 cw(c100.647,87.374) U1.6@100.437,87.164 ; v2@108.605,94.09 ccw(c108.28,93.794) 108.28,94.234 ; v2@108.605,94.378 cw(c108.28,94.674) 108.28,94.234 ; v2(108.763,94.234) 108.28,94.234 ; C3.2@112.65,106.7 112.959,106.7 114.45,105.209 R3.1@114.45,104.623 ; C3.2@112.8,106.627 cw(c112.8,106.066) 113.196,106.463 ; C3.2@112.919,107 ccw(c113.546,107) C3.2@113.103,106.557 ; C3.2@113.173,107 ccw(c114.413,107) 113.536,106.123 ; 113.58,106.079 cw(c112.501,105) R3.1@114.027,105 ; 114.014,105.646 cw(c113.368,105) R3.1@114.281,105 ; R3.1@114.45,105.031 115.466,105.031 ; R3.1@114.764,105.264 ccw(c115.325,105.825) 115.325,105.031 ; R3.1@114.766,104.738 cw(c115.466,104.049) 115.466,105.031 ; v2@116.094,104.191 ccw(c115.579,104.191) 115.943,104.554 ccw(c116.307,104.918) v2@116.307,104.404 ; v2(116.307,104.191) 115.466,105.031
  Bottom Layer w0.254: v2(108.763,94.234) 111.531,94.234 116.942,99.644 116.942,103.556 v2(116.307,104.191) ; v2@108.913,94.083 cw(c109.277,93.72) 109.277,94.234 cw(c109.277,94.748) v2@108.913,94.385 ; v2@116.307,103.978 cw(c116.307,103.464) 116.67,103.827 cw(c117.034,104.191) v2@116.52,104.191
FM: R10.2 U1.26 | length 25.8
  Top Layer w0.254: U1.26@93.713,82.464 ccw(c93.503,82.674) 93.8,82.674 ccw(c94.097,82.674) U1.26@93.887,82.464 ; U1.26@93.8,81.853 93.8,82.827 94.59,83.617 ; v2@95.243,83.911 cw(c94.59,84.49) 94.59,83.617 ; v2(95.402,83.769) 95.25,83.617 94.59,83.617
  Top Layer w0.7: v2(81.6,88.138) R10.2@81.6,89
  Bottom Layer w0.254: v2@81.6,87.925 cw(c81.6,87.411) 81.964,87.774 cw(c82.327,88.138) v2@81.813,88.138 ; v2(81.6,88.138) 86.197,83.541 90.602,83.541 93.243,86.182 94.209,86.182 95.58,84.811 95.58,83.947 v2(95.402,83.769) ; v2@95.252,83.92 ccw(c94.459,84.713) 95.58,84.713 ; v2@95.431,83.74 ccw(c95.072,84.099) 95.58,84.099